# Altium PCB CANtact.PcbDoc
Units mil, origin at the board's own origin, x right, y up, seen from the top; angles counter-clockwise.
Board outline 2041 x 787.4 mil, 2 copper layers (Top Layer, Bottom Layer); 36 components, 26 nets, 159 pads, 72 vias.
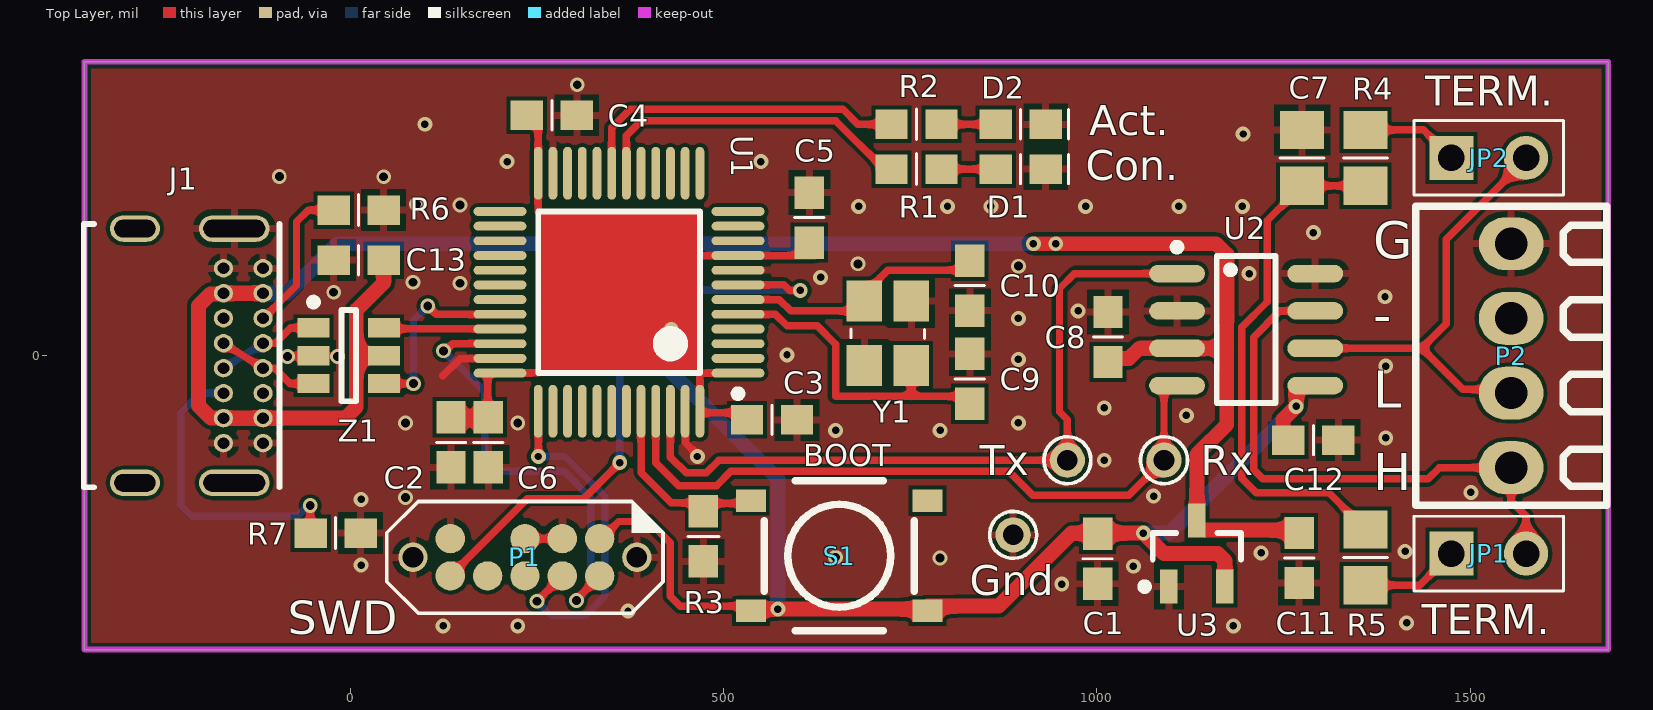
[diagram p0: Top Layer view]
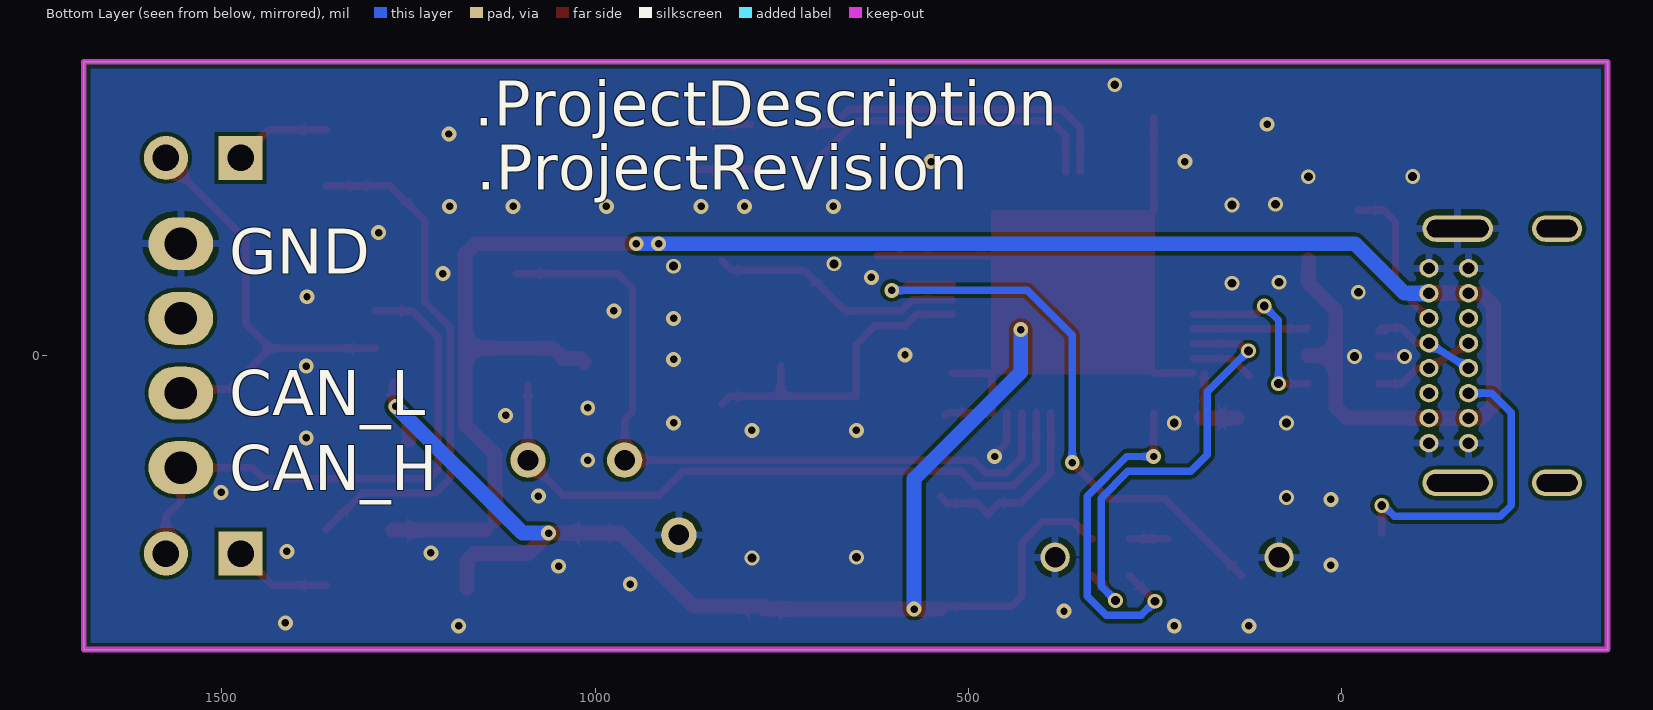
[diagram p1: Bottom Layer view, seen from below]
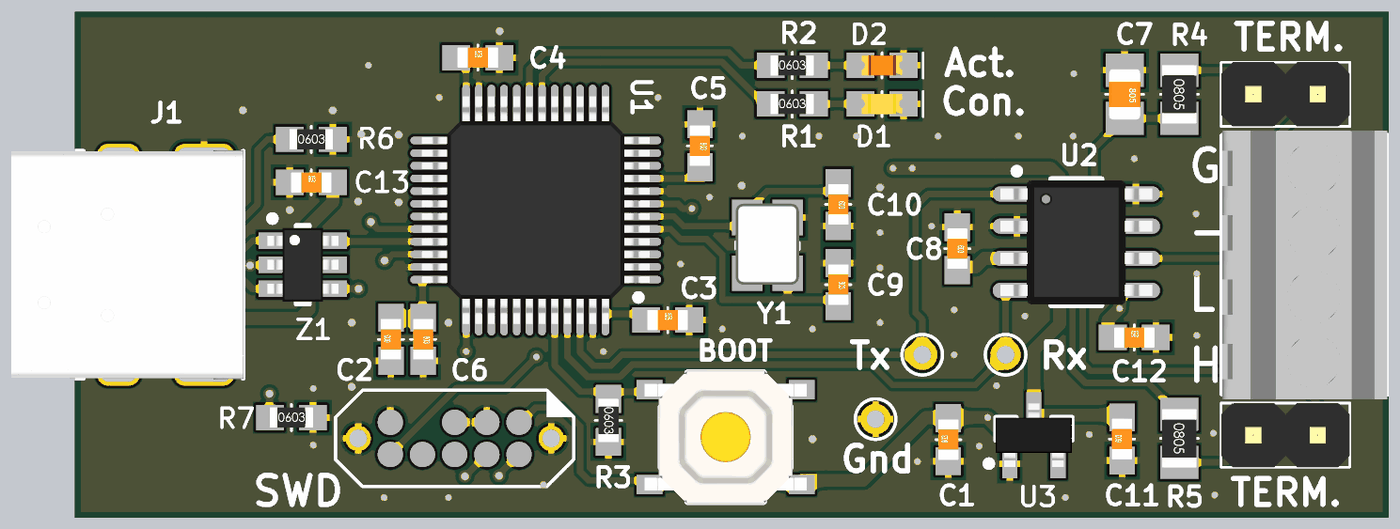
[diagram p2: 3D render of the assembled board from above, using the file's embedded part models]

## Layer stack, top to bottom
Top Solder: solder mask 0.4, Solder Resist, Dk 3.5
Top Layer: signal copper 1.4
Dielectric 1: dielectric 12.6, FR-4, Dk 4.8
Bottom Layer: signal copper 1.4
Bottom Solder: solder mask 0.4, Solder Resist, Dk 3.5

## Board outline
-356,-393.7 1685,-393.7 1685,393.7 -356,393.7

## Design rules (kind name [scope] priority, off if disabled: settings)
Clearance [All] p1: gap=5 ignorepadtopadclearanceinfootprint=FALSE except(0: Arc-Hole Track-Hole SMDPad-Hole THPad-Hole Via-Hole Fill-Hole Poly-Hole Region-Hole Text-Hole)
MinimumSolderMaskSliver [All] p1 off: minsoldermaskwidth=4
PlaneConnect PlaneConnect_Via [All] p1: planeconnectstyle=Direct reliefexpansion=20 reliefentries=4 reliefconductorwidth=10 reliefairgap=10
PlaneConnect [All] p2: planeconnectstyle=Relief reliefexpansion=20 reliefentries=4 reliefconductorwidth=10 reliefairgap=8
PolygonConnect PolygonConnect_Via [IsVia] p1: connectstyle=Direct reliefconductorwidth=10 reliefentries=4 polygonreliefangle="90 Angle" airgapwidth=10
PolygonConnect [All] p2: connectstyle=Relief reliefconductorwidth=10 reliefentries=4 polygonreliefangle="90 Angle" airgapwidth=8
RoomDefinition CANtact [InComponentClass('CANtact')] p1: confinementstyle=ConfineIn formatcopy=TRUE lockcomponents=FALSE outline -507,-448 1746,-448 1746,446 -507,446
RoutingVias [All] p1: holewidth=28 width=50 viastyle="Through Hole" minholewidth=28 minwidth=50 maxholewidth=28 maxwidth=50
SilkToSolderMaskClearance [IsPad] p1: minsilkscreentomaskgap=5 clearancetoexposedcopper=TRUE
SolderMaskExpansion [All] p1: expansion=4
Width [All] p1: maxlimit=20 minlimit=10 preferedwidth=10
27 further rules are at their usual default settings.

## Components (designator, comment, footprint, x,y, rotation, side; value= is the part's Value field where it differs from the comment)
C1 "1uF" CCNP1608-0603 1001,-272 r90 top
C2 "1uF" CCNP1608-0603 135,-116 r90 top
C3 "100nF" CCNP1608-0603 565,-86 r0 top
C4 "100nF" CCNP1608-0603 270,322 r0 top
C5 "100nF" CCNP1608-0603 615,185 r270 top
C6 "100nF" CCNP1608-0603 185,-116 r270 top
C7 "4.7nF" CCNP2012-0805 1275,265 r270 top
C8 "100nF" CCNP1608-0603 1015,25 r270 top
C9 "18pF" CCNP1608-0603 830,-30.96 r270 top
C10 "18pF" CCNP1608-0603 830,93.81 r270 top
C11 "1uF" CCNP1608-0603 1271,-271 r90 top
C12 "100nF" CCNP1608-0603 1290,-113 r0 top
C13 "100nF" CCNP1608-0603 11.19,128 r0 top
D1 "LED Yellow" LED1608-0603-Yellow 898,250 r180 top
D2 "LED Red" LED1608-0603-RED 898,310 r180 top
Gnd "TP" "PCBPIN - 0.7MM" 888,-240 r0 top
J1 "USB4085-GF-A" USB4085-GF-A -275.24,0 r0 top
JP1 "PIN2X1" HDR1X2S 1475,-265 r0 top
JP2 "PIN2X1" HDR1X2S 1475,265 r0 top
P1 "SWD Connector 2x5-Pin" SWD-2X5-JIG-PADS 334,-245 r180 top
P2 "Terminal4_BUCHANAN" TYCO-282834-4 1555,-150 r90 top
R1 "1K" CR1608-0603 758.46,250 r0 top
R2 "1K" CR1608-0603 758.46,310 r0 top
R3 "510 ohm" CR1608-0603 473,-242 r270 top
R4 "60.4 ohm" CR2012-0805 1360,265 r270 top
R5 "60.4 ohm" CR2012-0805 1360,-270 r270 top
R6 "5.1K" CR1608-0603 11.19,195 r0 top
R7 "5.1K" CR1608-0603 -19.59,-237.6 r0 top
Rx "TP" "PCBPIN - 0.7MM" 1090,-139.96 r0 top
S1 "SMD-SW-4_5.1x5.1x2.0" SMD-SW-4_5.1x5.1x2.0 655,-268 r0 top
Tx "TP" "PCBPIN - 0.7MM" 960.55,-139.96 r0 top
U1 "STM32F042C6T6" TSQFP50P900X900-48N 360,85 r90 top
U2 "MCP2562-E/SN" SO-8_L 1200,35 r270 top
U3 "XC6206P332MR" SOT23_N 1134,-265 r270 top
Y1 "16 MHz" Crystal_SMD_3.2x2.5 720,30 r90 top
Z1 "USBLC6-2SC6" SOT23-6_N -2,0 r180 top

## Footprints (in the part's own frame and the unit in brackets; to place one, negate y for a bottom-side part, rotate by r counter-clockwise, add the part's x,y. Pads: shape width x height; smd on the part's side, far side on the other; paste and mask are expansions set on the pad)
CCNP1608-0603 [mm]
  rect 1.1x1 smd: 1(-0.85,0) 2(0.85,0)
  silkscreen extent 0,-0.5 0,0.5, body extent -0.8,-0.4 0.8,0.4, height 0.3
CCNP2012-0805 [mm]
  rect 1.3x1.5 smd: 1(-0.95,0) 2(0.95,0)
  silkscreen extent 0,-0.75 0,0.75, body extent -1,-0.62 1,0.63, height 0.78
CR1608-0603 [mm]
  rect 1.1x1 smd: 1(-0.85,0) 2(0.85,0)
  silkscreen extent 0,-0.53 0,0.53, body extent -0.85,-0.4 0.85,0.4, height 0.56
CR2012-0805 [mm]
  rect 1.3x1.5 smd: 1(-0.95,0) 2(0.95,0)
  silkscreen extent 0,-0.75 0,0.75, body extent -1.15,-0.67 1.15,0.68, height 0.76
Crystal_SMD_3.2x2.5 [mm] "Crystal SMT low profile 3.2 x 2.5 SMD"
  rect 1.4x1.2 smd: 1(-1.1,-0.8) 2(1.1,-0.8) 3(1.1,0.8) 4(-1.1,0.8)
  silkscreen extent -0.17,-1.25 0.15,1.25, body extent -1.55,-1.24 1.65,1.26, height 0.7
HDR1X2S [mm] "Connector; Header; 2 Position; Straight"
  rect 1.5x1.5 hole 0.9: 1(0,0)
  round 1.5 hole 0.9: 2(2.54,0)
  silkscreen extent -1.27,-1.27 3.81,1.27, body extent -1.27,-1.27 3.81,1.27, height 6
LED1608-0603-RED [mm] "SMT-LED 0603"
  rect 1.1x1 smd: A(0.85,0) K(-0.85,0)
  silkscreen extent -1.62,-0.5 0,0.5, body extent -0.8,-0.4 0.8,0.4, height 0.7
LED1608-0603-Yellow [mm] "SMT-LED 0603"
  rect 1.1x1 smd: A(0.85,0) K(-0.85,0)
  silkscreen extent -1.62,-0.5 0,0.5, body extent -0.8,-0.4 0.8,0.4, height 0.7
"PCBPIN - 0.7MM" [mm]
  round 1.2 hole 0.7: 1(0,0)
  silkscreen extent -0.8,-0.8 0.8,0.8
SMD-SW-4_5.1x5.1x2.0 [mil] "Miniature SMD PCB Push Button - C318888"
  rect 40x30 smd: 1(118.11,-73.82) 1b(-118.11,-73.82) 2(118.11,73.82) 2b(-118.11,73.82)
  silkscreen extent -100,-100 100,100, body extent -126,-104 126,104, height 79
SO-8_L [mm] "8-Pin Small Outline Integrated Circuit 1.27 mm Pitch, IPC High Density"
  oval 0.6x1.9 smd: 1(-1.905,-2.35) 2(-0.635,-2.35) 3(0.635,-2.35) 4(1.905,-2.35) 5(1.905,2.35) 6(0.635,2.35) 7(-0.635,2.35) 8(-1.905,2.35)
  silkscreen extent -2.93,-2.47 2.5,1, body extent -2.45,-3 2.45,3, height 1.7
SOT23-6_N [mm] "SOT23, 6-Leads, Body 2.9x1.6mm, Pitch 0.95mm, Lead Span 2.7mm, IPC Medium Density"
  rect 1.1x0.65 smd: 1(1.2,-0.95) 2(1.2,0) 3(1.2,0.95) 4(-1.2,0.95) 5(-1.2,0) 6(-1.2,-0.95)
  silkscreen extent -0.25,-1.95 1.32,1.55, body extent -1.4,-1.45 1.4,1.45, height 1.45
SOT23_N [mm] "SOT23, 3-Leads, Body 2.9x1.3mm, Pitch 0.95mm, Lead Span 2.3mm - IPC Medium Density"
  rect 1.15x0.6 smd: 1(1.125,-0.95) 2(1.125,0.95) 3(-1.125,0)
  silkscreen extent -0.7,-1.9 1.25,1.5, body extent -1.25,-1.5 1.25,1.5, height 1.05
SWD-2X5-JIG-PADS [mm] "Connector; SWD; 2x5 Position"
  round 1 hole 0.7: 0(-1.27,0.635) 0(6.35,0.635)
  round 1 smd: 1(0,0) 2(0,1.27) 3(1.27,0) 4(1.27,1.27) 5(2.54,0) 6(2.54,1.27) 8(3.81,1.27) 9(5.08,0) 10(5.08,1.27)
  silkscreen extent -2.16,-1.26 7.24,2.53
TSQFP50P900X900-48N [mm] "Thin QFP, 48-Leads, Body 7x7mm, Pitch 0.5mm, IPC Medium Density"
  oval 0.3x1.8 smd: 1(-2.75,-4.05) 2(-2.25,-4.05) 3(-1.75,-4.05) 4(-1.25,-4.05) 5(-0.75,-4.05) 6(-0.25,-4.05) 7(0.25,-4.05) 8(0.75,-4.05) 9(1.25,-4.05) 10(1.75,-4.05) 11(2.25,-4.05) 12(2.75,-4.05) 25(2.75,4.05) 26(2.25,4.05) 27(1.75,4.05) 28(1.25,4.05) 29(0.75,4.05) 30(0.25,4.05) 31(-0.25,4.05) 32(-0.75,4.05) 33(-1.25,4.05) 34(-1.75,4.05) 35(-2.25,4.05) 36(-2.75,4.05)
  oval 1.8x0.3 smd: 13(4.05,-2.75) 14(4.05,-2.25) 15(4.05,-1.75) 16(4.05,-1.25) 17(4.05,-0.75) 18(4.05,-0.25) 19(4.05,0.25) 20(4.05,0.75) 21(4.05,1.25) 22(4.05,1.75) 23(4.05,2.25) 24(4.05,2.75) 37(-4.05,2.75) 38(-4.05,2.25) 39(-4.05,1.75) 40(-4.05,1.25) 41(-4.05,0.75) 42(-4.05,0.25) 43(-4.05,-0.25) 44(-4.05,-0.75) 45(-4.05,-1.25) 46(-4.05,-1.75) 47(-4.05,-2.25) 48(-4.05,-2.75)
  silkscreen extent -3.57,-4.18 2.75,2.75, body extent -4.5,-4.5 4.5,4.5, height 1.6
TYCO-282834-4 [mm] "Terminal Block (2.54mm)"
  oval 1.8x2.2 hole 1.1: 1(0,0) 2(2.54,0) 3(5.08,0) 4(7.62,0)
  silkscreen extent -1.27,-3.25 8.89,3.25, body extent -1.51,-3.25 9.11,3.25, height 10
USB4085-GF-A [mm] "USB-C Connector"
  oval 0.65x0.62 hole 0.4: A1(4.025,2.975) A4(4.025,2.125) A5(4.025,1.275) A6(4.025,0.425) A7(4.025,-0.425) A8(4.025,-1.275) A9(4.025,-2.125) A12(4.025,-2.975) B1(2.675,-2.975) B4(2.675,-2.125) B5(2.675,-1.275) B6(2.675,-0.425) B7(2.675,0.425) B8(2.675,1.275) B9(2.675,2.125) B12(2.675,2.975)
  oval 2.4x0.9 hole 0.6 slot 2.1 at 0 deg: P1(3.045,4.325) P2(3.045,-4.325)
  oval 1.7x0.9 hole 0.6 slot 1.4 at 0 deg: P3(-0.335,-4.325) P4(-0.335,4.325)
  silkscreen extent -2.07,-4.47 4.58,4.47, body extent -4.56,-4.52 4.61,4.51, height 3.46

## Part data
C1 C2 C11: library part Cap_CCNP_0603, "Capacitor non-polar SMT 0603", LCSC=C15849, Manufacturer="Generic Components", Class=Passive, Published=08/06/2000, Publisher="Altium Hobart Technology Centre", SubClass=Capacitor
C3 C4 C5 C6 C8 C12 C13: library part Cap_CCNP_0603, "Capacitor non-polar SMT 0603", LCSC=C14663, Manufacturer="Generic Components", Class=Passive, Published=08/06/2000, Publisher="Altium Hobart Technology Centre", SubClass=Capacitor
  C13: Parameter 1=C14663
C7: library part Cap_CCNP_0805, "Capacitor non-polar SMT 0805", LCSC=C1744, Manufacturer="Generic Components", Class=Passive, Published=08/06/2000, Publisher="Altium Hobart Technology Centre", SubClass=Capacitor
C9 C10: library part Cap_CCNP_0603, "Capacitor non-polar SMT 0603", LCSC=C1647, Manufacturer="Generic Components", Class=Passive, Published=08/06/2000, Publisher="Altium Hobart Technology Centre", SubClass=Capacitor
D1: library part LED-0603-Yellow, "LED 0603 Yellow", LCSC=C72038, Manufacturer="Generic Components", Class I=Optoelectronic, Class II=LED, Farnell PN=5790852, Published=8-Jun-2000, Publisher="Altium Limited", Revision="July-2002: Re-released for DXP Platform."
D2: library part LED-0603-Red, "LED 0603 Red", LCSC=C2286, Manufacturer="Generic Components", Class I=Optoelectronic, Class II=LED, Farnell PN=1581239, Published=8-Jun-2000, Publisher="Altium Limited", Revision="July-2002: Re-released for DXP Platform."
Gnd Rx Tx: "Test Point"
J1: "USB-C, USB 2.0 Receptacle Connector 16 Position Through Hole, Right Angle", Digikey Part Number=2073-USB4085-GF-ACT-ND, Angle=90, Digikey=2073-USB4085-GF-ACT-ND, Digikey Link=https://www.digikey.ee/product-detail/en/gct/USB4085-GF-A/2073-USB4085-GF-ACT-ND/9859733, Farnell PN=2924867, Part Number=USB4085-GF-A
P1: library part SWD2X5_JIG, Farnell PN=1865285, LatestRevisionDate=17-Jul-2002, LatestRevisionNote="Re-released for DXP Platform.", Publisher="Altium Limited"
P2: "2.54mm Terminal Block", Farnell PN=2396253
R1 R2: library part Res_CR0603, "Resistor SMT 0603", LCSC=C21190, Manufacturer="Generic Components", Class=Passive, Published=08/06/2000, Publisher="Altium Hobart Technology Centre", SubClass=Resistor
R3: library part Res_CR0603, "Resistor SMT 0603", LCSC=C23193, Manufacturer="Generic Components", Class=Passive, Published=08/06/2000, Publisher="Altium Hobart Technology Centre", SubClass=Resistor
R4 R5: library part Res_CR0805, "Resistor SMT 0805", LCSC=C72998, Manufacturer="Generic Components", Class=Passive, Published=08/06/2000, Publisher="Altium Hobart Technology Centre", SubClass=Resistor
R6 R7: library part Res_CR0603, "Resistor SMT 0603", LCSC=C23186, Manufacturer="Generic Components", Class=Passive, Published=08/06/2000, Publisher="Altium Hobart Technology Centre", SubClass=Resistor
S1: library part SW_PB-TS, "Tactile Switch SPST 5.10mm X 5.10mm", LCSC=C318888, Revision=1.0
U1: "ARM Microcontroller with CAN", LCSC=C88447, Farnell PN=2750630
U2: "CAN Tranceiver", LCSC=C53609, Farnell PN=2362839
U3: "3V3 200mA, LDO regulator (Low ESR ceramic caps)", LCSC=C5446, Farnell PN=8796980
Y1: library part "Crystal 16MHz", "Crystal SMD 3.2 x 2.5 x 0.7 mm", LCSC=C13738, Manufacturer="Generic Components", Class=Oscillator, Published=08/06/2000, Publisher="Altium Hobart Technology Centre", SubClass="Crystal Oscillator"
Z1: "TVS diode array for USB", LCSC=C7519, Digikey=497-5235-1-ND, Farnell PN=1269406

## Via types
v1: diameter 20, hole 10, Top Layer to Bottom Layer, tented both sides, 49 vias
v2: diameter 19.68, hole 11.81, Top Layer to Bottom Layer, tented both sides, 23 vias

## Nets (pads, with @x,y where several pads share a name; then routed paths per layer and width w, separated by ;. In a path a pad name is that pad's centre, name@x,y a point inside that pad or via, vN(x,y) a via of type N, cw(c..) or ccw(c..) an arc to the next point about the centre after c; other vN are vias at no path point)
3V3: C1.2 C2.2 C3.1 C4.1 C5.2 C6.1 C12.1 P1.1 S1.1 S1.1b U1.1 U1.9 U1.24 U1.36 U1.48 U2.5 U3.2 | length 2507
  Top Layer w10: C6.1@184,-79.66 U1.36@184,-23.61 ; U1.36@198.93,-22.92 252.08,-22.92 257.63,-17.37 265,-17.37 ; 251.73,193.27 U1.24 C4.1@251.73,319 ; P1.1 336.91,-245 359.84,-222.08 400.21,-222.08 428.9,-250.77 428.9,-322.22 442,-335.32 533.32,-335.32 S1.1b@537.32,-339.32 ; 424.21,134.21 U1.9 C5.2@622.32,134.21 ; 451.54,-6.54 468.27,-23.27 468.27,-26.73 ; U1.1@521.42,-23.27 U1.1 471.73,-23.27 468.27,-26.73 ; C3.1@531.54,-80 527.95,-76.42 468.27,-76.42 U1.48 468.27,-26.73
  Top Layer w20: C2.2@140,-83.66 185,-83.66 C6.1@187.87,-83.66 ; S1.1b@537.32,-339.32 v1(572.79,-339.32) S1.1@773.54,-339.32 ; S1.1@773.54,-335.32 868.68,-335.32 966.4,-237.6 v1(1062.32,-237.6) 1089.72,-265 1162,-265 1171.65,-274.65 U3.2@1171.65,-311.28 ; C12.1@1249.35,-113 1249.35,-85.65 v1(1267,-68) U2.5@1267,-40
  Bottom Layer w20: v1(430,35) 430,-22 572.79,-164.79 v1@572.79,-335.32 ; v1(1062.32,-237.6) 1097.4,-237.6 v1(1267,-68)
5V: C8.2 C11.2 C13.2 J1.A4 J1.A9 J1.B4 J1.B9 U2.3 U3.3 Z1.5 | length 2719
  Top Layer w20: J1.A4 J1.B9 -170.77,82.82 -187.35,82.82 -203.23,66.94 -203.23,-67.04 -186.61,-83.66 J1.B4 J1.A9 -6.66,-83.66 8,-69 8,0 ; C13.2 44.65,97.68 8,61.03 8,0 ; Z1.5 8,0 ; v1(915,150) v1(945,150) 1160,150 1174.13,135.87 1174.13,46.41 1174,46.28 1174,10 ; C8.2 1019.88,-3.58 1043.24,-3.58 1056.83,10 U2.3 1174,10 ; U3.3@1134.25,-220.72 1134,-220.47 1134,-132.33 1174,-92.33 1174,10 ; 1147.13,-233.6 C11.2@1271,-233.6
  Bottom Layer w20: J1.A4 -84,83.66 -17.66,150 v1(915,150) v1(945,150)
BOOT: R3.1 S1.2b U1.44 | length 263
  Top Layer w10: U1.44@389.53,-76.42 389.53,-157.01 429.71,-197.2 458.63,-197.2 473.31,-211.88 R3.1@473.31,-212.37 ; R3.1@473.31,-213.54 R3.1@473.31,-212.37 ; S1.2b@527.32,-198.68 S1.2b@537.32,-188.68 ; S1.2b@527.32,-197.68 488,-197.68 R3.1@473.31,-212.37
CAN_H: JP1.2 P2.1 U2.7 | length 756.5
  Top Layer w10: U2.7@1294.49,60 U2.7 1245,60 1210,25 1210,-153 1222,-165 1444,-165 1459,-150 P2.1 1555,-195 1575,-215 JP1.2
CAN_L: JP2.2 P2.2 U2.6 | length 611.4
  Top Layer w10: U2.6@1294.49,10 1435,10 ; P2.2@1570,-50 1565,-45 1490,-45 1435,10 ; JP2.2@1575,263 1468,156 1468,43 1435,10
CAN_RX: Rx.1 U1.45 U2.4 | length 901.1
  Top Layer w10: U1.45@409.21,-76.42 409.21,-143.21 440.18,-174.18 490.62,-174.18 509.8,-155 882.25,-155 914.25,-187 1043,-187 1090,-140 U2.4@1090,-40
CAN_TX: Tx.1 U1.46 U2.1 | length 994.6
  Top Layer w10: U1.46@428.9,-76.42 428.9,-136.11 449.79,-157 476.89,-157 493.89,-140 Tx.1@950,-140 ; Tx.1 960.55,-85.43 950,-74.88 950,90 970,110 U2.1@1105.51,110
G_LED: R1.1 U1.18 | length 425.3
  Top Layer w10: U1.18@369.84,246.42 369.84,294.84 390,315 650,315 R1.1@712.5,252.5
GND: C1.1 C2.1 C3.2 C4.2 C5.1 C6.2 C7.1 C8.1 C9.1 C10.2 C11.1 C12.2 C13.1 D1.K D2.K Gnd.1 J1.A1 J1.A12 J1.B1 J1.B12 J1.P1 P1.0 P1.3 P1.5 P1.9 P2.4 R3.2 R6.2 R7.2 U1.8 U1.23 U1.35 U1.47 U2.2 U2.8 U3.1 Y1.2 Y1.4 Z1.2 | length 234.8
  Top Layer w10: v2(-84,-1) -83.5,-0.5 -49.74,-0.5 Z1.2 ; 124,-27 147.07,-3.93 198.24,-3.93 U1.35@198.58,-3.58 ; P1.5 P1.3 ; U1.47@448.58,-76.42 448.93,-76.76 448.93,-116.22 465,-132.29 v1(465,-135)
  other v1: 124.32,-362 224.32,-362 1183,-362 1415,-358 372,-342 953,-306 1049,-282 14.46,-280.39 1220,-264 1413,-262 14.46,-192.45 1076,-188 1501,-183 1010,-140 1387,-110 650,-100 790,-100 895,-90 1120,-80 1010,-70 1387,-14 895,-5 585,1 895,50 975,60 1386,79 630,105 1204,110 1290,165 681,200 800,200 858,200 985,200 1110,200 1195,200 210,260 550,260 1196,297 100,310
  other v2: 790,-271 650,-270 74,-190 74,-90 224.32,-90 -17,-1 -22.28,85 147,97 84,98.32 895,120 680,123 147,202 88.77,203 -95,240 44.65,239.8 304,363
NetC7_2: C7.2 R4.2 R5.1 | length 704.6
  Top Layer w10: R5.1 1311,-183.6 1213.6,-183.6 1194,-164 1194,38 1228,72 1228,180.6 C7.2 R4.2
NetD1_A: D1.A R1.2 | length 73.1
  Top Layer w10: R1.2 D1.A@865,250
NetD2_A: D2.A R2.2 | length 73.1
  Top Layer w10: R2.2 D2.A@865,310
NetJ1_A5: J1.A5 R6.1 | length 207.3
  Top Layer w10: J1.A5@-114.73,52.26 J1.A5 -116.19,50.2 -72,94.39 -72,179.54 -56.54,195 R6.1
NetJ1_B5: J1.B5 R7.1 | length 415
  Top Layer w10: R7.1@-53.59,-238.13 v2(-53.59,-200.58)
  Bottom Layer w10: J1.B5 -200.68,-50.2 -227,-76.52 -227,-200.6 -212.6,-215 -70.63,-215 -56.21,-200.58 v2(-53.59,-200.58)
NetJP1_1: JP1.1 R5.2 | length 132.6
  Top Layer w10: R5.2 1432.6,-307.4 JP1.1
NetJP2_1: JP2.1 R4.1 | length 130.5
  Top Layer w10: R4.1 1437.6,302.4 JP2.1
OSC_IN: C9.2 U1.5 Y1.1 | length 440.3
  Top Layer w10: U1.5@521.42,55.47 569.53,55.47 585,40 625.35,40 650,15.35 650,-54.5 650.08,-54.42 751.5,-54.42 ; Y1.1 751.5,-54.42 ; C9.2 819.99,-54.42 751.5,-54.42
OSC_OUT: C10.1 U1.6 Y1.3 | length 342.7
  Top Layer w10: U1.6@521.42,75.16 574.84,75.16 590,60 665.35,60 685.55,80.2 720,114.65 817.37,114.65 C10.1
R_LED: R2.1 U1.19 | length 452.2
  Top Layer w10: U1.19@350.16,246.42 350.16,305.16 375,330 660,330 680,310 R2.1
RESET*: P1.10 U1.7 | length 811.5
  Top Layer w10: P1.10 237.32,-191.68 312.54,-191.68 v1(361,-143.21) ; U1.7@521.42,94.84 580.95,94.84 588.29,87.5 v1(602.71,87.5)
  Bottom Layer w10: v1(361,-143.21) 361,27.47 421.03,87.5 v1(602.71,87.5)
SWCLK: P1.4 U1.37 | length 461.1
  Top Layer w10: v2(250,-329) P1.4 ; U1.37@251.73,-76.42 252,-76.68 v1(252,-135)
  Bottom Layer w10: v2(250,-329) 268.84,-347.84 315.16,-347.84 341,-322 341,-188.29 287.71,-135 v1(252,-135)
SWDIO: P1.2 U1.34 | length 597
  Top Layer w10: v2(125,6.5) 127.62,6.5 137.22,16.1 U1.34@198.58,16.1 ; v2(303,-328) 303,-326 P1.2
  Bottom Layer w10: v2(125,6.5) 180,-48.5 180,-132.69 202.31,-155 286.5,-155 322.37,-190.87 322.37,-308.63 v2(303,-328)
USB_DM: U1.32 Z1.4 | length 250.6
  Top Layer w10: Z1.4 v2(84.72,-37.4) ; v2(103.9,66.54) 114.96,55.47 U1.32@198.58,55.47
  Bottom Layer w10: v2(84.72,-37.4) 84.72,47.35 v2(103.9,66.54)
USB_DP: U1.33 Z1.6 | length 154
  Top Layer w10: Z1.6 46.51,36.13 198.24,36.13 U1.33@198.58,35.79
USBD+: J1.A6 J1.B6 Z1.1 | length 152.3
  Top Layer w10: J1.A6@-114.72,18.8 J1.A6 -100.24,16.73 -79.56,37.4 -53.24,37.4 -49.24,33.4 Z1.1@-58.1,33.4
  Bottom Layer w10: J1.B6 J1.A6
USBD-: J1.A7 J1.B7 Z1.3 | length 138.9
  Top Layer w10: J1.B7 J1.A7 -101.27,-16.73 -80.6,-37.4 Z1.3
pads on no net: J1.A8 J1.B8 J1.P2 J1.P3 J1.P4 P1.6 P1.8 P2.3 S1.2 U1.2 U1.3 U1.4 U1.10 U1.11 U1.12 U1.13 U1.14 U1.15 U1.16 U1.17 U1.20 U1.21 U1.22 U1.25 U1.26 U1.27 U1.28 U1.29 U1.30 U1.31 U1.38 U1.39 U1.40 U1.41 U1.42 U1.43

## Polygon pours and split planes (outlines as drawn)
GND on Top Layer "g" (solid, remove dead copper, pour order 2): -356,393.7 1685,393.7 1685,-393.7 -356,-393.7
GND on Bottom Layer "g" (solid, remove dead copper, pour order 0): -356,-393.7 -356,393.7 1685,393.7 1685,-393.7

## Keep-outs
Keep-Out Layer:
  the board outline again, w7.87

## Other copper
Top Layer:
  rectangle net 3V3: 250,-25 470,195

## Silkscreen, mask and mechanical layers (free items; w line width, h text height)
Top Overlay:
  text "TERM." at 1440,335 h40
  text "Act." at 990,295 h40
  text "Con." at 985,235 h40
  text "G" at 1370,130 h50
  text "-" at 1370,30 h50
  text "L" at 1370,-70 h50
  text "BOOT" at 607,-148 h30
  text "H" at 1370,-180 h50
  text "SWD" at -84,-373 h45
  text "TERM." at 1435,-373 h40
Bottom Overlay:
  text ".ProjectDescription" at 1162,308 h60
  text ".ProjectRevision" at 1159,222 h60
  text "GND" at 1490,110 h60
  text "CAN_L" at 1490,-80 h60
  text "CAN_H" at 1490,-180 h60
Mechanical 1:
  lines w10: -225.24,0 33,0